# Altium PCB wulpus_pro_shield.PcbDoc (part 3 of 3)
Units mm, origin at the board's own origin, x right, y up, seen from the top; angles counter-clockwise.
Board outline 44.9 x 21 mm, 6 copper layers (Top Layer, Layer 2, Layer 3, Layer 4, Layer 5, Bottom Layer), stack 0.913 mm thick; 186 components, 134 nets, 731 pads, 283 vias.
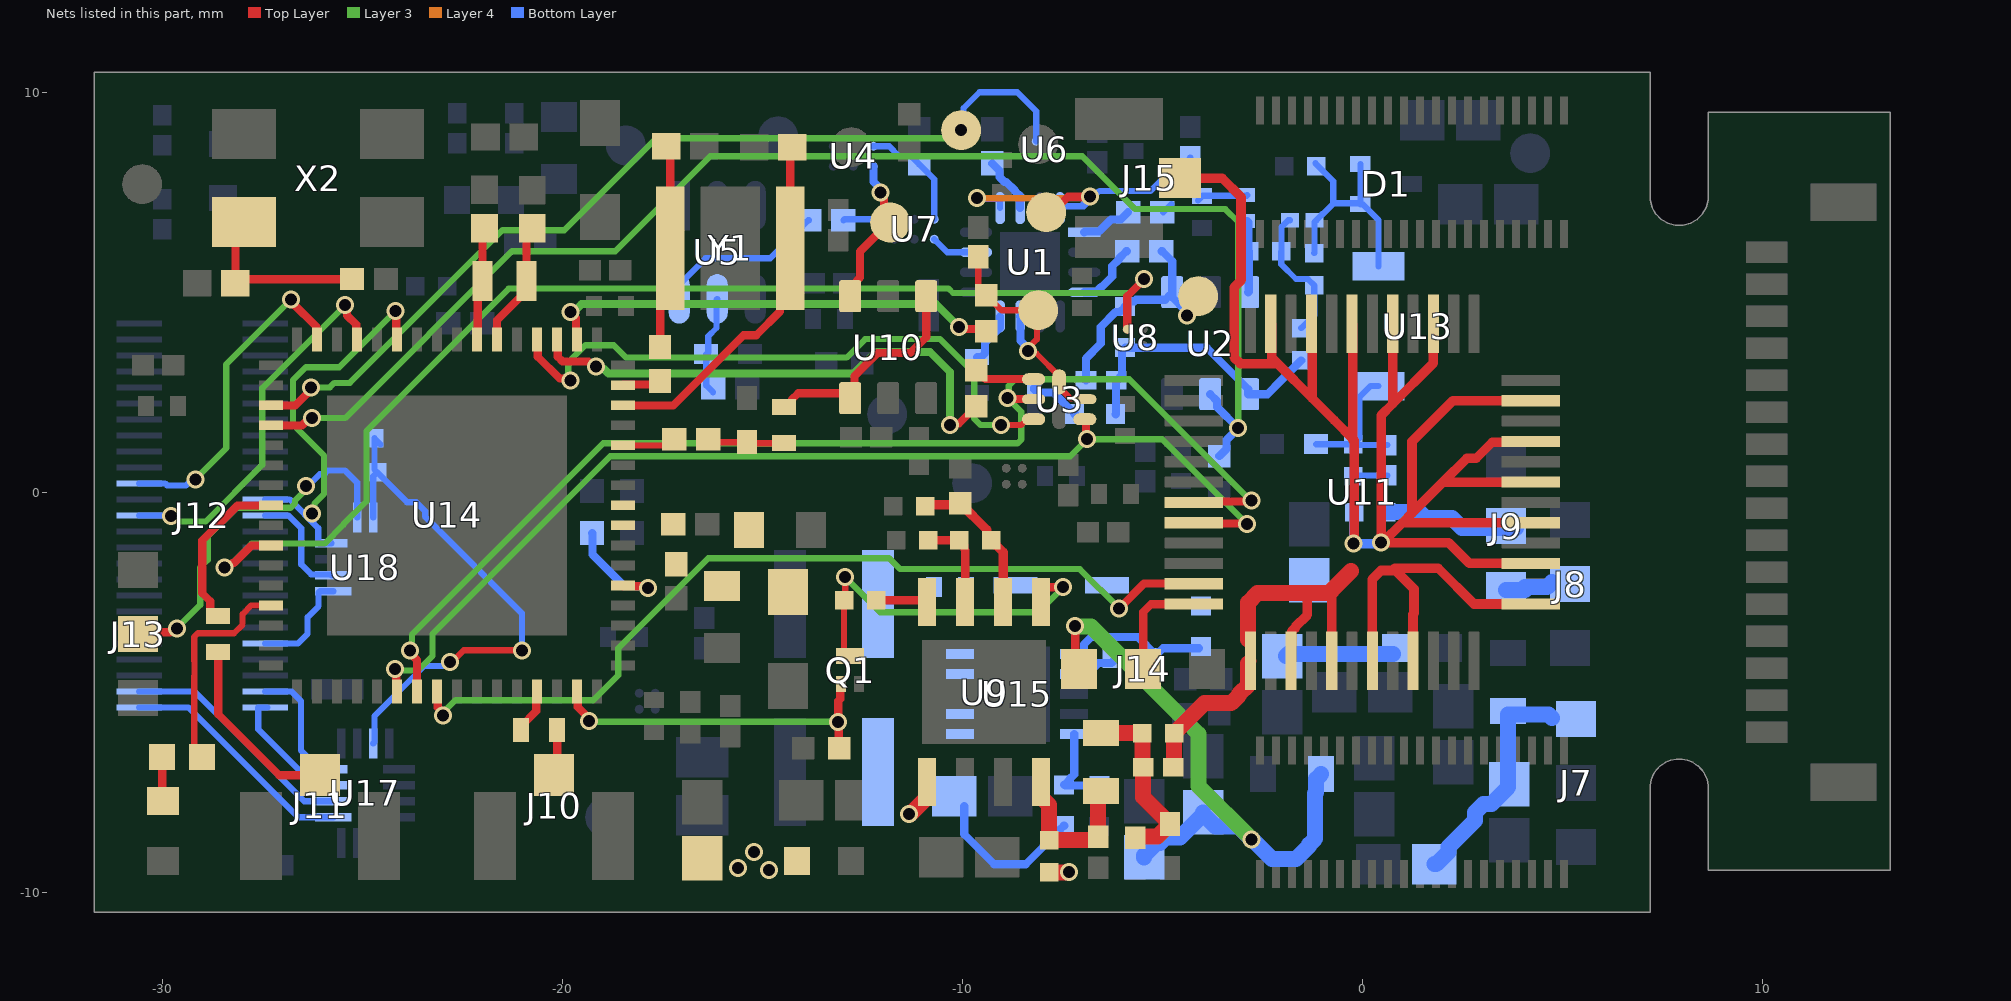
[diagram p7: the nets of this part, all layers, seen from the top]

## Via types
v1: diameter 0.45, hole 0.3, Top Layer to Bottom Layer, tented both sides, 283 vias

## Nets (pads, with @x,y where several pads share a name; then routed paths per layer and width w, separated by ;. In a path a pad name is that pad's centre, name@x,y a point inside that pad or via, vN(x,y) a via of type N, cw(c..) or ccw(c..) an arc to the next point about the centre after c; other vN are vias at no path point) (continued)
JTAG_TDO: J12.38 U14.13 | length 9.6
  Top Layer w0.203: v1@-25.422,4.675 -25.379,4.633 -25.379,4.423 -25.148,4.192 -25.148,3.838 U14.13@-25.13,3.82
  Layer 3 w0.152: v1(-29.781,-0.588) -29.701,-0.588 -29.557,-0.732 -28.914,-0.732 -27.5,0.683 -27.5,2.602 v1(-25.427,4.675)
  Bottom Layer w0.152: J12.38@-30.575,-0.58 -29.789,-0.58 v1(-29.781,-0.588)
JTAG_TEST: J12.12 U14.11 U18.4 | length 10.4
  Top Layer w0.203: v1(-24.167,4.533) -24.192,4.533 -24.2,4.525 -24.2,4.458 -24.148,4.407 -24.148,3.838 U14.11@-24.13,3.82
  Layer 3 w0.152: v1(-26.255,-0.532) -26.198,-0.475 -26.198,-0.283 -25.952,-0.037 -25.952,0.914 -26.726,1.688 -26.726,2.809 -26.41,3.125 -25.575,3.125 v1(-24.167,4.533)
  Bottom Layer w0.152: J12.12@-27.425,-0.18 -26.817,-0.18 -26.1,-0.897 -26.1,-1.152 -26.099,-1.153 -26.099,-1.241 -26.065,-1.275 U18.4@-25.77,-1.275 ; v1(-26.255,-0.532) -26.224,-0.563 -26.224,-0.774
JTAG_TMS: J12.40 U14.15 | length 8.3
  Top Layer w0.203: v1(-26.776,4.821) -26.73,4.776 -26.73,4.721 -26.148,4.139 -26.148,3.838 U14.15@-26.13,3.82
  Layer 3 w0.152: v1(-29.169,0.324) -29.169,0.33 -28.399,1.101 -28.399,3.198 v1(-26.776,4.821)
  Bottom Layer w0.152: J12.40@-30.575,0.22 -29.93,0.22 -29.88,0.171 -29.403,0.171 -29.25,0.324 v1(-29.169,0.324) ; v1@-26.759,4.838 v1(-26.776,4.821) v1@-26.73,4.776
LED_MSP430: R36.1 U14.29 | length 5.5
  Top Layer w0.152: R36.1@-29,-6.625 -29.2,-6.425 -29.2,-4.6 -29.195,-4.595 -29.195,-4.222 -29.2,-4.217 -29.2,-3.615 -29.111,-3.526 -28.206,-3.526 -27.99,-3.31 -27.99,-3.047 -27.774,-2.831 U14.29@-27.28,-2.831
LFXIN: C55.2 U14.6 Y2.1 | length 3.1
  Top Layer w0.203: U14.6@-21.63,3.82 -21.63,4.301 -21.05,4.882 -21.038,4.882 -20.89,5.03 Y2.1@-20.89,5.28 -20.89,6.456 C55.2@-20.75,6.596
LFXOUT: C53.2 U14.7 Y2.2 | length 2.9
  Top Layer w0.203: U14.7@-22.13,3.82 -22.112,3.838 -22.112,5.159 Y2.2@-21.99,5.28 -21.99,6.551 C53.2@-21.94,6.601
LVL_SHIFTER_EN: R45.1 R46.2 U17.7 U18.7 | length 13.4
  Top Layer w0.152: v1@-22.803,-4.245 -22.803,-4.274 -22.786,-4.274 -22.462,-3.95 -21.024,-3.95 -21.024,-3.955 v1(-21.008,-3.955)
  Bottom Layer w0.152: U17.7@-24.725,-6.28 -24.691,-6.246 -24.691,-5.591 -23.443,-4.343 -22.855,-4.343 -22.824,-4.312 -22.824,-4.266 v1@-22.803,-4.245 ; U18.7@-24.725,-0.63 -24.725,0.4 R46.2@-24.627,0.498 ; R46.2@-24.698,0.569 R45.1@-24.698,1.348 ; R45.1@-24.698,1.35 R45.1@-24.698,1.348 ; R46.2@-24.627,0.5 R46.2@-24.627,0.498 ; R45.1@-24.54,1.19 R45.1@-24.698,1.348 ; v1@-21.011,-3.955 v1(-21.008,-3.955) ; v1@-21.008,-3.944 -21.008,-3.024 -23.424,-0.608 -23.424,-0.476 -23.65,-0.25 -23.879,-0.25 R46.2@-24.627,0.498
  other v1: -22.803,-4.245
MSP_DR1: J12.13 U18.2 | length 2.8
  Bottom Layer w0.152: J12.13@-27.425,-0.58 -26.845,-0.58 -26.525,-0.9 -26.525,-1.805 -26.277,-2.052 -25.793,-2.052 U18.2@-25.77,-2.075
MSP_DR2: J12.21 U18.1 | length 2.7
  Bottom Layer w0.152: J12.21@-27.425,-3.78 -26.605,-3.78 -26.365,-3.54 -26.365,-3.12 -26.092,-2.847 -26.092,-2.509 -26.058,-2.475 U18.1@-25.72,-2.475
NetC1_1: C1.1 R2.2 R3.1 R7.2 U2.4 | length 7.1
  Bottom Layer w0.203: R2.2@-6.162,1.95 -6.156,1.956 -6.156,2.794 C1.1@-6.15,2.8 -6.136,2.8 -6.002,2.935 -6.002,3.536 R3.1@-5.925,3.612 -3.887,3.612 -2.85,2.575 U2.4@-2.85,2.45 -2.373,2.45 -2.016,2.807 -2.016,2.809 -1.527,3.298 R7.2@-1.525,3.298
NetC3_2: C3.2 R2.1 | length 1.3
  Bottom Layer w0.203: C3.2@-8.2,2.604 -8.2,2.569 -8.12,2.489 -7.714,2.489 -7.188,1.963 R2.1@-7.188,1.95 R2.1@-7.21,1.973
NetC4_2: C4.2 U1.4 | length 1.7
  Bottom Layer w0.203: U1.4@-6.95,5 -6.658,5 -6.53,5.129 -6.513,5.129 -6.25,5.392 -6.25,5.654 -6.085,5.819 -6.085,5.84 -5.9,6.025 C4.2@-5.879,6.025
NetC6_1: C6.1 D1.1 D1.2 R6.1 R28.2 U13.3 | length 6.1
  Bottom Layer w0.152: R6.1@-1.2,5.977 -1.196,5.981 -1.196,6.75 -1.146,6.8 -1.146,6.804 -1.001,6.949 -0.988,6.949 -0.724,7.213 -0.724,7.774 -1.173,8.223 R28.2@-1.173,8.225 ; -0.724,7.225 -0.07,7.225 D1.1@-0.045,7.2 ; D1.2@-0.045,8.2 D1.1@-0.045,7.2 ; U13.3@0.407,5.649 0.407,6.803 0.01,7.2 D1.1@-0.045,7.2
NetC6_2: C6.2 R6.2 R7.1 R8.1 | length 3.5
  Bottom Layer w0.152: R8.1@-2.023,6.025 -2.025,6.023 -2.025,5.7 -1.656,5.331 -1.358,5.331 R6.2@-1.2,5.173 -1.2,4.425 R7.1@-1.525,4.102 R7.1@-1.525,4.102 ; R8.1@-2.02,6.03 -2.02,6.63 -1.85,6.8 C6.2@-1.804,6.8
NetC7_2: C7.2 U1.1 | length 1.3
  Bottom Layer w0.203: U1.1@-6.95,6.5 -6.932,6.518 -6.582,6.518 -6.285,6.815 -6.038,6.815 C7.2@-5.854,7
NetC9_2: C9.2 U5.6 | length 4.3
  Bottom Layer w0.152: U5.6@-17.075,4.834 -17.075,5.191 -16.416,5.85 -14.8,5.85 -13.85,6.8 C9.2@-13.829,6.8
NetC21_2: C21.2 C36.2 R15.2 R26.1 R30.2 | length 4.7
  Top Layer w0.4: R15.2@-6.525,-6.025 R30.2@-5.502,-6.025 -5.49,-6.037 -5.49,-6.863 C36.2@-5.479,-6.875 -5.479,-7.621 -4.9,-8.2 -4.85,-8.2 -4.8,-8.25 -4.8,-8.35 -4.85,-8.4 -4.91,-8.4 -5.116,-8.605 -5.645,-8.605 C21.2@-5.675,-8.635
NetC23_2: C23.2 C38.1 R21.2 | length 1.9
  Top Layer w0.152: C38.1@-16.346,1.325 -16.271,1.25 C23.2@-15.375,1.25 -15.35,1.225 R21.2@-14.45,1.225
NetC34_1: C34.1 C35.1 J7.1 R24.2 | length 5.8
  Bottom Layer w0.4: C34.1@1.801,-9.3 1.85,-9.3 2.153,-8.997 2.153,-8.871 2.822,-8.202 2.822,-8.003 3.027,-7.798 3.226,-7.798 3.65,-7.374 3.65,-5.562 4.662,-5.562 4.75,-5.65
NetC37_1: C37.1 R25.1 R29.2 U13.1 | length 3.6
  Bottom Layer w0.152: R29.2@-1.15,1.2 R25.1@-0.225,1.2 ; U13.1@0.407,2.651 0.204,2.651 -0.075,2.372 -0.075,1.35 R25.1@-0.225,1.2 ; C37.1@0.625,1.179 -0.204,1.179 R25.1@-0.225,1.2
NetC38_2: C38.2 U14.60 | length 1.3
  Top Layer w0.152: U14.60@-18.48,1.17 -17.358,1.17 C38.2@-17.204,1.325
NetC49_2: C49.2 R35.1 X2.1 | length 4.6
  Top Layer w0.203: X2.1@-27.95,6.75 -28.171,6.529 C49.2@-28.171,5.225 -28.071,5.325 R35.1@-25.25,5.325
NetC52_2: C52.2 R38.1 Y1.1 | length 5.2
  Top Layer w0.203: R38.1@-17.55,3.625 -17.55,5.85 Y1.1@-17.3,6.1 -17.3,8.546 C52.2@-17.404,8.65
NetC62_1: C62.1 D3.1 U15.5
NetC62_2: C62.2 L4.2 U15.4
NetC77_2: C77.2 U1.14 | length 1.4
  Bottom Layer w0.203: C77.2@-9.25,8.221 -9.065,8.037 -9.065,7.876 -8.946,7.758 -8.899,7.758 -8.682,7.54 -8.682,7.523 -8.56,7.402 U1.14@-8.56,7.11
NetC78_1: C78.1 C79.1 J14.1 R23.2 | length 15.7
  Top Layer w0.203: v1(-7.176,-3.349) -7.176,-4.324 J14.1@-7.075,-4.425
  Layer 3 w0.4: v1(-7.176,-3.349) -7.166,-3.359 -6.778,-3.359 -4.093,-6.044 -4.093,-7.347 v1(-2.765,-8.675)
  Bottom Layer w0.4: C78.1@-5.45,-9.126 -5.45,-9.076 -5.147,-8.773 -5.059,-8.773 -4.913,-8.627 -4.552,-8.627 C79.1@-3.975,-8.05 ; C79.1@-3.975,-8.001 C79.1@-3.975,-8.05 ; R23.2@-1.025,-7.05 -1.15,-7.175 -1.15,-7.509 -1.175,-7.534 -1.175,-8.662 -1.325,-8.812 -1.325,-8.838 -1.662,-9.175 -2.251,-9.175 -2.751,-8.675 v1(-2.765,-8.675) -2.778,-8.675 -3.1,-8.353 -3.672,-8.353 C79.1@-3.975,-8.05
NetD2_2: D2.2 R36.2 | length 1.1
  Top Layer w0.203: R36.2@-30,-6.625 -30,-7.7 D2.2@-29.975,-7.725
NetJ8_2: J8.2 J9.3 | length 1.2
  Bottom Layer w0.4: J9.3@3.6,-2.45 J9.3@4.075,-2.45 ; J9.3@4.075,-2.375 4.625,-2.375 J8.2@4.75,-2.25
NetJ9_2: J9.2 R27.2 | length 3.4
  Bottom Layer w0.4: R27.2@0.602,-0.5 1.436,-0.5 1.586,-0.65 2.25,-0.65 2.5,-0.9 J9.2@3.85,-0.9
NetJ10_1: J10.1 R33.1 | length 1.2
  Top Layer w0.203: J10.1@-20.2,-7.075 -20.125,-7 R33.1@-20.125,-5.95
NetJ11_1: J11.1 R34.1 | length 4.7
  Top Layer w0.203: R34.1@-28.6,-4 -28.6,-5.549 -27.074,-7.075 J11.1@-26.05,-7.075
NetJ13_2: J13.2 U18.6 | length 9.1
  Top Layer w0.203: J13.2@-30.6,-3.55 -30.552,-3.502 -29.8,-3.502 -29.701,-3.402 v1(-29.634,-3.402)
  Layer 3 w0.152: v1(-29.634,-3.402) -29.05,-2.818 -29.05,-1.883 -28.856,-1.69 -28.856,-1.101 -28.142,-0.387 -26.792,-0.387 -26.676,-0.271 -26.676,-0.203 -26.404,0.069 v1(-26.404,0.15)
  Bottom Layer w0.152: v1(-26.404,0.15) -26.363,0.15 -26.062,0.45 -25.955,0.45 -25.857,0.548 -25.436,0.548 -25.125,0.237 U18.6@-25.125,-0.63
NetJ14_2: J14.2 U11.24 | length 2.8
  Top Layer w0.203: J14.2@-5.475,-4.425 -5.475,-2.995 -5.28,-2.8 -4.222,-2.8 U11.24@-4.216,-2.794
NetL3_2: L3.2 U15.2
NetR4_2: R4.2 U1.8 | length 1.3
  Bottom Layer w0.203: R4.2@-9.625,3.375 -9.525,3.375 -9.427,3.473 -9.427,3.74 -9.053,4.114 U1.8@-9.053,4.397
NetR5_2: R5.2 U3.1 | length 1.5
  Top Layer w0.2: R5.2@-9.65,3.054 -9.646,3.054 -9.418,2.825 U3.1@-8.215,2.825
NetR8_2: R8.2 R9.2 U2.3 | length 1.8
  Bottom Layer w0.203: R9.2@-2.875,6.775 -2.851,6.751 -2.851,6.049 R8.2@-2.827,6.025 -2.839,6.014 -2.839,5.011 U2.3@-2.85,5
NetR21_1: R21.1 U10.1 U10.4 | length 5.5
  Top Layer w0.203: R21.1@-14.45,2.125 -14.35,2.125 -14.252,2.223 -14.252,2.323 -14.1,2.475 -12.8,2.475 -12.689,2.586 -12.689,2.91 -12.119,3.48 -11.295,3.48 -10.9,3.875 U10.1@-10.9,4.9
NetR31_1: R31.1 U14.53 | length 2.9
  Top Layer w0.203: U14.53@-18.48,-2.33 -18.462,-2.349 -17.968,-2.349 -17.917,-2.4 v1(-17.85,-2.4)
  Bottom Layer w0.203: R31.1@-19.25,-1.025 -19.239,-1.036 -19.239,-1.559 -18.446,-2.353 -17.897,-2.353 v1(-17.85,-2.4)
NetR39_1: R39.1 R40.1 U15.10 | length 2.3
  Bottom Layer w0.203: R39.1@-7.45,-7.313 R39.1@-7.443,-7.313 ; R39.1@-7.447,-7.31 R39.1@-7.443,-7.313 ; U15.10@-7.2,-6.048 -7.2,-7.058 -7.302,-7.16 -7.302,-7.177 -7.438,-7.313 R39.1@-7.443,-7.313 ; R40.1@-6.575,-7.333 -7.423,-7.333 R39.1@-7.443,-7.313
NetR41_1: R41.1 U15.7 | length 1.2
  Bottom Layer w0.203: U15.7@-7.2,-4.548 -7.177,-4.524 -6.951,-4.524 -6.852,-4.424 -6.746,-4.424 -6.595,-4.273 -6.273,-4.273 -6.137,-4.137 R41.1@-6.137,-4.125
NetR41_2: R41.2 R42.2 U15.6 | length 3.8
  Bottom Layer w0.203: U15.6@-7.2,-4.048 -6.975,-4.048 -6.951,-4.024 -6.951,-3.799 -6.776,-3.623 -5.602,-3.623 R41.2@-5.163,-4.062 ; R41.2@-5.238,-4.15 -5.163,-4.075 R41.2@-5.163,-4.062 ; R42.2@-4.077,-3.9 -4.983,-3.9 -5.085,-4.002 -5.102,-4.002 R41.2@-5.163,-4.062
NetTP8_1: TP8.1 U4.C2 U10.3 | length 3.8
  Top Layer w0.203: U10.3@-12.8,4.9 -12.626,5.074 -12.626,5.291 -12.551,5.366 -12.551,6.022 -11.83,6.744 TP8.1@-11.8,6.744 ; v1(-12.049,7.499) -12.049,7.432 -11.952,7.335 -11.952,6.893 TP8.1@-11.9,6.841
  Bottom Layer w0.203: U4.C2@-12.225,8.15 -12.225,8.144 -12.221,8.139 -12.221,7.762 -12.025,7.567 -12.025,7.5 -12.026,7.499 v1(-12.049,7.499)
PCAP: C10.1 C11.2 U5.5 | length 2.5
  Bottom Layer w0.152: C10.1@-16.229,2.5 -16.4,2.671 C11.2@-16.4,3.45 -16.35,3.5 -16.35,3.9 -16.144,4.106 -16.144,4.816 U5.5@-16.125,4.834
PREAMP_EN: R12.1 U2.5 U14.20 | length 34.8
  Top Layer w0.203: U14.20@-27.28,1.671 -26.506,1.671 -26.322,1.855 v1(-26.255,1.855)
  Layer 3 w0.152: v1(-26.255,1.855) -25.428,1.855 -21.258,6.025 -18.675,6.025 -16.3,8.4 -7,8.4 -5.676,7.076 -3.419,7.076 -3.099,6.756 -3.099,4.001 -3.1,4 v1(-3.1,1.6)
  Bottom Layer w0.203: U2.5@-3.8,2.45 -3.626,2.277 -3.626,2.127 v1(-3.1,1.6) -3.39,1.31 -3.39,1.085 -3.573,0.902 R12.1@-3.575,0.902
PREAMP_PWR_EN: U8.B2 U14.26 | length 30
  Top Layer w0.203: v1(-28.439,-1.887) -28.372,-1.887 -28.249,-1.765 -28.208,-1.765 -27.773,-1.33 U14.26@-27.28,-1.33 ; U8.B2@-5.875,4.075 -5.875,4.9 v1(-5.45,5.325) v1@-5.497,5.372
  Layer 3 w0.152: v1(-28.439,-1.887) -28.366,-1.887 -27.764,-1.286 -25.943,-1.286 -25.472,-0.815 -25.472,-0.806 -24.898,-0.231 -24.898,1.53 -21.338,5.089 -10.339,5.089 -10.231,4.981 -5.794,4.981 v1(-5.45,5.325)
PULS_HIZ_EN: Q1.1 R16.2 U14.47 | length 8.7
  Top Layer w0.203: U14.47@-19.63,-4.98 -19.612,-4.998 -19.612,-5.372 -19.325,-5.658 v1(-19.325,-5.725) ; R16.2@-13.073,-6.4 -13.086,-6.386 -13.086,-5.764 v1(-13.1,-5.75) -13.1,-5.221 -13.049,-5.169 -13.049,-4.823 Q1.1@-13.025,-4.8
  Layer 3 w0.152: v1(-19.325,-5.725) -19.312,-5.737 -13.112,-5.737 v1(-13.1,-5.75)
PULSER_EN_A: Q1.3 R19.1 U9.1 | length 9.2
  Top Layer w0.152: v1(-12.925,-2.125) -12.925,-2.673 R19.1@-12.952,-2.7 -12.952,-3.976 -12.828,-4.1 Q1.3@-12.8,-4.1
  Top Layer w0.203: U9.1@-8.025,-3.002 -8.025,-2.499 -7.901,-2.375 v1(-7.475,-2.375)
  Layer 3 w0.152: v1(-12.925,-2.125) -12.05,-3 -8.1,-3 v1(-7.475,-2.375)
PULSER_EN_B: R19.2 U9.4 | length 1.3
  Top Layer w0.203: R19.2@-12.148,-2.7 -10.925,-2.7 U9.4@-10.875,-2.75
PULSER_IN_A: R13.2 R14.2 R17.1 U9.2 | length 3.8
  Top Layer w0.24: R13.2@-10.923,-0.35 -10.886,-0.314 -10.086,-0.314 R14.2@-10.05,-0.277 -10.048,-0.277 -9.387,-0.938 -9.387,-1.086 R17.1@-9.273,-1.2 R17.1@-9.273,-1.2 -8.975,-1.5 U9.2@-8.975,-2.75
PULSER_IN_B: R17.2 R18.2 U9.3 | length 2.4
  Top Layer w0.203: R18.2@-10.848,-1.2 R17.2@-10.077,-1.2 -9.945,-1.332 -9.945,-1.434 -9.925,-1.454 U9.3@-9.925,-2.75
PULSER_OUT_A: C20.2 R15.1 R20.1 U9.8 | length 3.9
  Top Layer w0.4: U9.8@-8.025,-7.25 -8,-7.275 -8,-7.65 -7.825,-7.825 R20.1@-7.825,-8.698 -6.668,-8.698 -6.66,-8.69 C20.2@-6.6,-8.69 ; C20.2@-6.6,-8.61 -6.6,-7.55 R15.1@-6.525,-7.475
PULSER_OUT_B: R20.2 U9.5 | length 1.5
  Top Layer w0.3: v1(-11.325,-8.05) v1@-11.3,-8.05
  Top Layer w0.4: v1(-11.325,-8.05) -11.315,-8.04 -11.29,-8.04 -10.875,-7.625 U9.5@-10.875,-7.25 ; v1(-7.325,-9.5) -7.326,-9.501 R20.2@-7.824,-9.501 ; R20.2@-7.825,-9.502 R20.2@-7.824,-9.501
PVCC: C39.2 C40.2 C41.1 C42.1 L1.2 U14.56 U14.57
RF_BYPASS: R11.1 U4.C1 U7.C1 | length 2.9
  Bottom Layer w0.152: U4.C1@-12.225,8.65 -11.825,8.65 -11.581,8.406 -11.283,8.406 R11.1@-11.075,8.198 -11.073,8.198 -10.7,7.825 U7.C1@-10.7,6.825
RF_IN_ENV: C9.1 U7.A1 | length 1.4
  Bottom Layer w0.152: C9.1@-12.971,6.8 -12.946,6.825 -11.95,6.825 ; -11.825,6.825 -11.95,6.825 ; U7.A1@-11.7,6.825 -11.95,6.825
RX_SPI_CLK: U3.5 U11.20 U14.38 | length 27.4
  Top Layer w0.203: v1(-24.18,-4.42) -24.148,-4.452 -24.148,-4.961 U14.38@-24.13,-4.98 ; U3.5@-6.935,1.825 -6.905,1.795 -6.905,1.355 v1(-6.875,1.325) ; U11.20@-4.216,-0.762 -4.197,-0.781 -2.894,-0.781 v1(-2.875,-0.8)
  Layer 3 w0.152: v1(-24.18,-4.42) -24.143,-4.457 -23.607,-4.457 -23.242,-4.092 -23.242,-3.542 -18.8,0.9 -7.3,0.9 v1(-6.875,1.325) ; v1@-6.85,1.325 -5,1.325 v1(-2.875,-0.8)
RX_SPI_MISO: U11.23 U14.40 | length 22.3
  Top Layer w0.203: U14.40@-23.13,-4.98 -23.112,-4.998 -23.112,-5.38 -22.975,-5.516 v1(-22.975,-5.583) ; v1(-6.075,-2.906) -5.455,-2.286 U11.23@-4.216,-2.286
  Layer 3 w0.152: v1(-22.975,-5.583) -22.975,-5.503 -22.672,-5.2 -19.225,-5.2 -18.6,-4.575 -18.6,-3.9 -16.35,-1.65 -11.829,-1.65 -11.555,-1.924 -7.057,-1.924 v1(-6.075,-2.906)
RX_SPI_MOSI: U3.2 U11.19 U14.39 | length 29.8
  Top Layer w0.203: v1(-23.8,-3.955) -23.8,-4.022 -23.63,-4.192 U14.39@-23.63,-4.98 ; v1(-8.863,2.35) -8.847,2.334 -8.224,2.334 U3.2@-8.215,2.325 ; U11.19@-4.216,-0.254 -4.194,-0.231 -2.795,-0.231 v1(-2.772,-0.209)
  Layer 3 w0.152: v1(-23.8,-3.955) -23.759,-3.914 -23.759,-3.559 -18.975,1.225 -8.614,1.225 -8.525,1.314 -8.525,2.012 v1(-8.863,2.35) -8.838,2.375 -8.838,2.662 -8.675,2.825 -5.825,2.825 -2.782,-0.218 v1(-2.772,-0.209)
SPI_B_CLK: J12.27 U17.2 | length 5.9
  Bottom Layer w0.152: J12.27@-30.575,-4.98 -29.195,-4.98 -26.45,-7.725 U17.2@-25.77,-7.725
SPI_B_CS: J12.24 U17.4 | length 3.2
  Bottom Layer w0.152: J12.24@-27.425,-4.98 -26.77,-4.98 -26.535,-5.215 ; -26.535,-6.455 -26.099,-6.891 -25.804,-6.891 U17.4@-25.77,-6.925 ; -26.532,-6.452 -26.532,-5.218
SPI_B_MISO: J12.26 U17.1 | length 6
  Bottom Layer w0.152: J12.26@-30.575,-5.38 -29.345,-5.38 -26.6,-8.125 U17.1@-25.72,-8.125
SPI_B_MOSI: J12.25 U17.3 | length 3.2
  Bottom Layer w0.152: J12.25@-27.375,-5.38 J12.25@-27.425,-5.38 -27.6,-5.38 -27.6,-5.926 -27.375,-6.151 -26.235,-7.291 -25.804,-7.291 U17.3@-25.77,-7.325
TRIG_OUT: R33.2 U14.45 | length 1.1
  Top Layer w0.203: R33.2@-21.025,-5.95 -21.025,-5.85 -20.648,-5.473 -20.648,-4.998 U14.45@-20.63,-4.98
TX_RX: C36.1 C37.2 J15.1 R25.2 R27.1 R30.1 U11.3 U11.5 U11.7 U11.9 U11.11 U11.25 U11.27 U11.29 U11.31 U11.33 U11.37 U11.39 U11.41 U11.43 U11.45 U11.47 | length 69
  Top Layer w0.24: J15.1@-4.225,7.85 -3.5,7.85 -3.03,7.38 -3.03,5.297 -3.204,5.124 -3.204,3.374 -3.046,3.215 -2.115,3.215 ; U11.11@-2.286,4.216 -2.266,4.197 -2.266,3.366 -2.115,3.215 ; -1.85,2.95 -2.115,3.215 ; U11.27@-1.778,-4.216 -1.758,-4.197 -1.758,-3.473 -1.68,-3.395 -1.68,-3.374 -1.37,-3.064 -1.37,-2.525 ; U11.9@-1.27,4.216 -1.25,4.197 -1.25,2.35 ; U11.29@-0.762,-4.216 -0.762,-2.462 ; U11.7@-0.254,4.216 -0.234,4.197 -0.234,1.334 ; -0.234,1.3 -0.234,1.334 ; v1(-0.221,-1.286) -0.2,-1.264 -0.2,1.3 -0.234,1.334 ; U11.31@0.254,-4.216 0.254,-2.172 0.469,-1.957 0.832,-1.957 1.295,-2.42 1.295,-3.028 1.27,-3.053 U11.33@1.27,-4.216 ; U11.5@0.762,4.216 0.762,2.212 ; 0.814,-1.9 1.9,-1.9 2.794,-2.794 U11.37@4.216,-2.794 ; U11.3@1.778,4.216 1.778,3.228 0.762,2.212 ; U11.39@4.216,-1.778 2.678,-1.778 2.159,-1.259 v1@0.509,-1.259 ; U11.41@4.216,-0.762 1.005,-0.762 ; U11.43@4.216,0.254 2.021,0.254 ; U11.45@4.216,1.27 4.197,1.25 3.25,1.25 2.85,0.85 2.617,0.85 2.021,0.254 ; U11.47@4.216,2.286 2.261,2.286 1.243,1.268 1.243,-0.524 ; -2.115,3.215 -1.25,2.35 ; -1.25,2.35 -0.7,1.8 -0.234,1.334 ; v1@0.509,-1.259 1.005,-0.762 ; v1@0.509,-1.259 v1(0.473,-1.259) 0.473,1.923 0.762,2.212 ; 1.005,-0.762 1.243,-0.524 ; 1.243,-0.524 2.021,0.254
  Top Layer w0.3: U11.25@-2.854,-4.277 U11.25@-2.794,-4.216
  Top Layer w0.4: C36.1@-4.721,-6.875 -4.71,-6.863 -4.71,-6.037 R30.1@-4.698,-6.025 -3.948,-5.275 -3.28,-5.275 -3.075,-5.07 -3.075,-5.042 -2.854,-4.821 U11.25@-2.854,-4.277 ; U11.25@-2.854,-3.685 -2.854,-2.759 -2.619,-2.525 -1.37,-2.525 -0.825,-2.525 -0.762,-2.462 -0.762,-2.447 -0.278,-1.963
  Bottom Layer w0.152: R27.1@-0.202,-0.5 -0.202,0.421 C37.2@0.625,0.421
  Bottom Layer w0.24: v1@-0.25,-1.314 v1(-0.221,-1.286) 0.448,-1.284 v1(0.473,-1.259) ; v1@-0.212,-1.276 -0.212,-0.51 R27.1@-0.202,-0.5
USSXTIN: C54.2 U14.62 Y1.3 | length 9.1
  Top Layer w0.203: U14.62@-18.48,2.171 -17.224,2.171 -15.469,3.925 -15.15,3.925 -14.554,4.521 -14.554,5.846 Y1.3@-14.3,6.1 -14.3,8.571 C54.2@-14.246,8.625
USSXTOUT: R38.2 U14.63 | length 1
  Top Layer w0.203: U14.63@-18.48,2.671 -18.462,2.689 -17.636,2.689 R38.2@-17.55,2.775
UUPS_TRIG_IN: R34.2 U14.24 | length 4.2
  Top Layer w0.203: R34.2@-28.6,-3.1 -28.7,-3.1 -28.798,-3.002 -28.798,-2.725 -29,-2.524 -29,-1.209 -28.121,-0.33 U14.24@-27.28,-0.33
VGA_GAIN: C5.1 R1.2 TP1.1 U1.7 U3.6 U3.8 | length 6.5
  Top Layer w0.152: C5.1@-9.6,5.884 -9.6,5.127 R1.2@-9.4,4.927 -9.398,4.927 -9.021,4.55 TP1.1@-8.1,4.55 -8.134,4.516 -8.134,3.821 -8.35,3.606 v1(-8.35,3.525) v1@-8.325,3.55 ; v1@-8.143,3.468 -7.575,2.9 U3.8@-7.575,2.76 -7.575,2.625 -7.375,2.425 -7.294,2.344 -6.954,2.344 U3.6@-6.935,2.325
  Bottom Layer w0.203: U1.7@-8.553,4.397 -8.546,4.39 -8.546,3.788 -8.35,3.592 v1(-8.35,3.525)
VGA_GAIN_CS: U3.3 U14.4 | length 15.7
  Top Layer w0.152: v1(-9.034,1.684) -8.518,1.684 -8.377,1.825 U3.3@-8.215,1.825
  Top Layer w0.203: U14.4@-20.63,3.82 -20.612,3.802 -20.612,3.388 -20.063,2.839 -19.84,2.839 v1(-19.793,2.792)
  Layer 3 w0.152: -19.85,3.244 -19.85,2.849 v1(-19.793,2.792) ; -19.851,3.245 -19.42,3.675 -18.713,3.675 -18.403,3.365 -12.889,3.365 -12.425,3.829 -10.554,3.829 -9.7,2.975 -9.7,1.839 -9.545,1.684 v1(-9.034,1.684)
VGA_GAIN_RC_EN: R5.1 U14.3 | length 13
  Top Layer w0.2: v1(-10.3,1.676) -10.252,1.724 -10.076,1.724 -9.654,2.146 R5.1@-9.65,2.146
  Top Layer w0.203: U14.3@-20.13,3.82 -20.112,3.802 -20.112,3.387 -19.993,3.268 -19.345,3.268 -19.222,3.145 v1(-19.155,3.145)
  Layer 3 w0.2: v1(-19.155,3.145) -19.107,3.097 -18.972,3.097 -18.846,2.971 -12.704,2.971 -12.175,3.5 -10.8,3.5 -10.3,3 v1(-10.3,1.676)
VGA_GAIN_RC_SINK: R1.1 U14.2 | length 11.5
  Top Layer w0.2: v1(-19.788,4.5) -19.775,4.487 -19.777,4.485 -19.65,4.357 -19.65,3.84 U14.2@-19.63,3.82 ; v1(-10.075,4.125) -10.027,4.077 -9.454,4.077 R1.1@-9.4,4.023
  Layer 3 w0.2: v1(-19.788,4.5) -19.72,4.5 -19.52,4.7 -10.65,4.7 v1(-10.075,4.125)
VGA_IN: C1.2 C4.1 R3.2 TP2.1 U2.1 | length 6
  Top Layer w0.203: v1(-4.383,4.421) -4.383,4.431 -4.05,4.765 TP2.1@-4.05,4.8
  Bottom Layer w0.203: C1.2@-6.907,2.8 -6.907,3.343 -6.536,3.714 -6.536,4.131 -6.165,4.502 -6.061,4.502 R3.2@-5.925,4.638 ; R3.2@-5.937,4.638 R3.2@-5.925,4.638 ; C4.1@-5.021,6.025 -5,6.025 -4.75,5.775 -4.75,4.985 -4.75,4.875 -4.431,4.556 -4.431,4.468 v1(-4.383,4.421) ; U2.1@-4.805,4.93 -4.923,4.811 -5.658,4.811 -5.695,4.774 -5.789,4.774 R3.2@-5.925,4.638
VGA_OUT: U1.11 U7.C2 | length 1.2
  Bottom Layer w0.152: U7.C2@-10.7,6.325 -10.375,6 U1.11@-9.656,6
VGA_PWR_EN: TP4.1 U6.B2 U14.19 | length 23.6
  Top Layer w0.203: U14.19@-27.28,2.171 -26.676,2.171 -26.275,2.571 v1(-26.275,2.622)
  Layer 3 w0.152: v1(-26.275,2.622) -25.81,2.622 -25.698,2.734 -25.313,2.734 -21.497,6.55 -19.95,6.55 -17.65,8.85 -10.263,8.85 -10.063,9.05 v1(-10.025,9.05)
  Bottom Layer w0.152: v1(-10.025,9.05) -9.968,9.107 -9.968,9.6 -9.569,10 -8.625,10 -8.15,9.525 U6.B2@-8.15,8.775
VGA_VREF: C2.2 C7.1 C8.1 R9.1 TP7.1 U1.13 U1.16 | length 10.6
  Top Layer w0.203: TP7.1@-7.875,6.975 -7.771,6.975 -7.358,7.388 v1(-6.806,7.388)
  Layer 4 w0.152: v1(-9.625,7.35) -6.844,7.35 v1(-6.806,7.388)
  Bottom Layer w0.152: v1(-9.625,7.35) -9.605,7.33 -9.093,7.33 -9.053,7.29 U1.13@-9.053,7.103 ; U1.16@-7.553,7.103 -7.553,7.11 -7.513,7.15 -6.963,7.15 ; v1@-6.94,7.222 -6.963,7.2 -6.963,7.15 ; v1(-6.806,7.388) -6.963,7.232 -6.963,7.15 ; C7.1@-4.975,7 C7.1@-4.765,7.21 ; C2.2@-4.3,8.37 -4.3,8.352 -4.484,8.168 -4.656,8.168 -5.289,7.535 -6.568,7.535 -6.587,7.515 -6.598,7.515 -6.765,7.348 -6.765,7.347 -6.922,7.191 -6.963,7.15 ; C8.1@-4.104,7.296 -3.987,7.412 -2.887,7.412 R9.1@-2.875,7.425
VOUT_NEG: C56.1 C63.1 D3.2 FB1.1 R42.1 | length 2.7
  Bottom Layer w0.4: C56.1@-1.9,-4.099 -1.85,-4.05 FB1.1@0.775,-4.05
VOUT_POS: C58.1 C60.1 FB2.1 R39.2 U15.1 | length 3.9
  Bottom Layer w0.203: C58.1@-9.951,-7.85 -9.951,-8.549 -9.2,-9.3 -8.413,-9.3 -7.598,-8.485 -7.598,-8.473 -7.55,-8.425 -7.462,-8.337 R39.2@-7.45,-8.337
  other v1: -14.825,-9.45 -15.6,-9.4 -15.2,-9
pads on no net: J1.3 J1.4 J1.37 J1.38 J2.3 J2.4 J2.37 J2.38 J4.17 J4.18 J6.17 J6.18 J12.3 J12.4 J12.5 J12.8 J12.9 J12.11 J12.14 J12.15 J12.16 J12.17 J12.19 J12.20 J12.22 J12.23 J12.28 J12.29 J12.30 J12.31 J12.32 J12.34 J12.35 J12.36 J12.44 J12.45 J12.46 J12.47 J12.48 U1.2 U1.3 U1.9 U1.10 U1.12 U11.1 U11.2 U11.14 U11.16 U11.35 U11.36 U13.2 U13.2_4 U14.21 U14.22 U14.23 U14.28 U14.30 U14.32 U18.3 U18.10

## Polygon pours and split planes (outlines as drawn)
GND on Bottom Layer "GND_L06_P071" (solid, remove dead copper, pour order 71): -47.5,-10.5 14.95,-10.5 14.969,27.5 -47.5,27.5
+VBAT on Bottom Layer "+VBAT_L06_P067" (solid, pour order 67): -27.995,4.5 -27.995,4.322 -27.995,3.75 -26.868,3.75 -26.866,3.753 -26.011,3.075 -24.8,2.2 -22.563,0.516 -21.806,-0.881 -21.125,-1.811 -19.475,-3.35 -19.413,-3.413 -19.179,-3.821 -19.055,-3.88 -18.65,-3.88 -18.7,-2.925 -20.05,-1.38 -20.625,-0.2 -21.125,0.67 -22.206,1.627 -24.1,3.075 -25.625,3.875 -26.011,4.164 -26.759,4.474
+5V on Bottom Layer "NONET_L-01_P-001" (solid, pour order 68): -7.775,0.2 -8.675,0.2 -8.7,0.225 -8.95,0.225 -8.95,0.25 -9.425,0.725 -10.2,0.725 -10.2,0.625 -11.425,-0.6 -11.475,-0.55 -13.3,-0.55 -14.375,0.525 -19.2,0.525 -21.5,2.825 -22.325,2.825 -22.325,3.25 -22.125,3.45 -20.175,3.45 -19.15,2.425 -17.15,2.425 -16.25,1.525 -8.65,1.525 -7.775,0.65 -7.75,0.65
+V_RX_CONN on Bottom Layer "+V_RX_CONN_L06_P057" (solid, pour order 57): -22.847,8.979 -22.95,7.642 -22.952,7.64 -22.95,7.638 -22.95,6.35 -22.85,6.25 -22.375,6.25 -22.3,6.35 -22.3,7.638 -22.379,8.979
BOT_EL on Bottom Layer "NONET_L-01_P-001" (solid, pour order 70): 3.725,7.525 5.275,5.975 5.275,-8.775 7.2,-8.775 7.25,-8.725 7.15,-8.625 7.15,10.3 7.075,10.375 7.05,10.35 3.7,10.35
VOUT_NEG on Bottom Layer "VOUT_NEG_L06_P065" (solid, pour order 65): -6.936,-2.114 -6.936,-2.528 -6.933,-2.532 -5.831,-2.532 -4.277,-3.351 -4.276,-3.35 -3.776,-3.351 -2.397,-4.654 -2.391,-4.647 -1.405,-4.647 -1.405,-3.541 -1.298,-2.851 -1.298,-1.734 -2.294,-1.734 -3.776,-2.877 -4.277,-2.877 -5.831,-2.115
+V_IO_IN on Bottom Layer "+V_IO_IN_L06_P047" (solid, pour order 47): -28.15,0.729 -28.15,-2.255 -28.15,-4.85 -29.572,-4.85 -29.775,-4.651 -29.775,1.55 -28.825,2.5 -28.15,2.525
VGA_VREF on Bottom Layer "VGA_VREF_L06_P060" (solid, pour order 60): -7.555,7.502 -7.098,7.502 -6.513,8.087 -6.513,8.42 -5.965,8.42 -3.75,7.594 -3.746,7.598 -2.679,7.598 -2.679,7.258 -2.671,7.249 -2.72,7.2 -4.244,7.2 -4.688,6.714 -5.295,6.714 -5.295,7.273 -5.451,7.535 -6.281,7.535 -6.964,6.852 -7.252,6.77 -7.555,6.777
VOUT_POS on Bottom Layer "VOUT_POS_L06_P080" (solid, pour order 80): -9.7,-5.938 -9.7,-6.163 -9.65,-6.323 -9.398,-7.073 -9.391,-8.691 -10.775,-10.075 -15.425,-10.075 -15.9,-9.6 -15.9,-8.825 -15.775,-8.7 -12.462,-8.7 -11.3,-8.45 -10.5,-8.038 -10.501,-7.074 -10.407,-5.922 -9.716,-5.922
VOUT_POS on Bottom Layer "VOUT_POS_L06_P074" (solid, pour order 74): -9.7,-5.938 -9.7,-6.163 -9.65,-6.323 -9.398,-7.073 -9.391,-8.691 -10.775,-10.075 -15.425,-10.075 -15.9,-9.6 -15.9,-8.825 -15.775,-8.7 -12.462,-8.7 -11.3,-8.45 -10.5,-8.038 -10.501,-7.074 -10.407,-5.922 -9.716,-5.922
VOUT_POS on Bottom Layer "VOUT_POS_L06_P066" (solid, pour order 66): -9.7,-5.938 -9.7,-6.163 -9.65,-6.323 -9.398,-7.073 -9.391,-8.691 -10.775,-10.075 -15.425,-10.075 -15.9,-9.6 -15.9,-8.825 -15.775,-8.7 -12.462,-8.7 -11.3,-8.45 -10.5,-8.038 -10.501,-7.074 -10.407,-5.922 -9.716,-5.922
+V_RX on Bottom Layer "+V_RX_L06_P062" (solid, pour order 62): -21.429,8.966 -21.596,7.651 -21.596,6.943 -21.185,6.943 -20.688,6.445 -20.698,6.434 -20.698,5.942 -20.12,5.942 -19.617,6.445 -19.617,8.207 -20.508,8.207 -20.958,8.457 -20.958,8.971
+VCC_MSP430_CONN on Bottom Layer "+VCC_MSP430_CONN_L06_P056" (solid, pour order 56): -30.231,7.594 -30.233,7.592 -30.233,7.075 -29.788,7.075 -29.502,6.788 -29.087,6.788 -28.826,7.026 -28.127,7.026 -28.127,7.688 -28.935,7.688 -29.11,7.863 -29.515,7.863 -29.784,7.594
DVCC1 on Bottom Layer "DVCC1_L06_P055" (solid, pour order 55): -30.23,8.931 -30.232,8.929 -30.232,8.417 -29.792,8.417 -29.5,8.125 -29.085,8.125 -28.8,8.375 -28.812,8.375 -28.125,8.375 -28.125,9.025 -28.933,9.025 -29.108,9.2 -29.513,9.2 -29.782,8.931
+V_IN_HV on Bottom Layer "+V_IN_HV_L06_P069" (solid, pour order 69): -17.781,-5.487 -17.154,-6.067 -17.154,-7.075 -15.853,-7.075 -14.7,-8.228 -14.7,-8.352 -13.902,-8.352 -13.9,-8.35 -13.904,-8.346 -13.898,-5.457 -11.655,-5.307 -10.378,-5.176 -9.701,-5.174 -9.701,-4.921 -9.702,-4.923 -10.4,-4.923 -11.875,-4.5 -13.902,-4.146 -13.898,-4.143 -13.898,-1.45 -14.697,-1.45 -14.7,-1.453 -14.7,-3.85 -16.157,-5.307 -17.729,-5.307 -17.792,-5.37
+V_RX on Bottom Layer "+V_RX_L06_P061" (solid, pour order 61): -15.436,4.881 -15.43,4.875 -15.43,3.864 -15.601,3.693 -15.599,3.691 -15.599,3.204 -15.003,3.204 -15.002,3.203 -13.526,4.074 -13.526,4.581 -13.423,4.969 -13.423,5.103 -13.423,5.484 -14.941,5.484 -15.174,5.452 -15.21,4.881
NetC62_1 on Bottom Layer "NETC62_1_L06_P058" (solid, pour order 58): -9.221,-2.531 -9.701,-2.718 -9.7,-2.718 -9.7,-4.173 -10.396,-4.174 -10.396,-3.926 -10.101,-2.615 -10.101,-2.123 -9.701,-2.123 -9.219,-2.117 -8.119,-2.117 -8.119,-2.531
NetC62_2 on Bottom Layer "NETC62_2_L06_P063" (solid, pour order 63): -11.703,-1.453 -10.493,-2.132 -10.493,-2.608 -10.533,-2.608 -11.09,-3.165 -11.09,-3.235 -11,-4.028 -10.396,-4.422 -9.7,-4.422 -9.703,-4.671 -9.705,-4.672 -10.396,-4.672 -11.701,-4.145 -11.703,-4.147 -12.498,-4.147 -12.498,-1.451 -12.496,-1.45 -12.493,-1.453
NetL3_2 on Bottom Layer "NETL3_2_L06_P059" (solid, pour order 59): -12.485,-5.648 -12.484,-5.647 -10.397,-5.419 -9.701,-5.419 -9.701,-5.657 -9.701,-5.673 -9.701,-5.677 -10.373,-5.677 -10.4,-5.677 -11.691,-6.53 -11.691,-8.348 -12.484,-8.348
+V_RX on Layer 4 "+V_RX_L04_P052" (solid, pour order 52): -6.798,3.802 -7.345,3.802 -7.475,3.842 -9.783,3.842 -11.05,2.575 -13.725,2.575 -17.85,6.7 -19.975,6.7 -20.3,7.025 -20.3,8.05 -20.225,8.125 -19.125,8.125 -18.775,7.775 -13.9,7.775 -12.15,9.525 -7.2,9.3 -7.2,8.625 -8.3,8.525 -8.3,7.212 -6.3,5.212 -6.3,4.3
DVCC1 on Layer 4 "DVCC1_L04_P076" (solid, pour order 76): -24.8,9.1 -24.45,8.75 -24.425,8.75 -24.425,5.4 -24.075,5.05 -23.575,5.05 -23.2,5.425 -23.2,8.4 -23.175,8.4 -22.475,9.1 -17.275,9.1 -17.05,9.325 -17.05,10.025 -17.5,10.475 -31.625,10.475 -31.625,10.45 -31.625,10.175 -31.625,-5.4 -31.65,-5.425 -31.65,-9.45 -19.375,-9.45 -15.875,-5.95 -13.025,-3.1 -11.475,-1.55 -5.875,-1.55 -5.075,-0.75 -5.075,-0.434 -5.206,-0.302 -5.618,-0.28 -6.269,-0.28 -7.225,-0.75 -14.4,-0.75 -16.775,-2.475 -23.562,-2.475 -24.05,-2.475 -24.911,-3.336 -24.911,-4.094 -24.556,-4.449 -24.567,-5.129 -25.475,-5.745 -28.275,-5.675 -30.063,-4.15 -30.037,-2.903 -29.332,-2.304 -29.345,-0.28 -29.875,0.075 -29.85,1.65 -28.675,2.854 -28.675,3.673 -30.238,5.078 -30.209,7.796 -29.718,8.277 -28.897,8.275 -25.243,9.1
BOT_EL on Layer 4 "BOT_EL_L04_P053" (solid, pour order 53): 5.275,5.975 3.725,7.525 -3.257,7.525 -3.9,8.125 -3.9,9.7 -3.55,10.05 5.45,10.05 7.15,8.35 7.15,5.975
+VCC_MSP430_CONN on Layer 4 "NONET_L-01_P-001" (solid, pour order 78): -29.387,7.863 -30,7.25 -30,5.202 -27.141,2.343 -27.141,1.366 -26.68,0.905 -26.741,0.845 -26.741,0.683 -26.527,0.47 -25.841,0.47 -25.216,1.095 -25.216,3.52 -26.237,4.542 -27.452,4.542 -28.125,5.215 -28.125,7.175
+V_RX_CONN on Layer 4 "NONET_L-01_P-001" (solid, pour order 77): -22.725,8.375 -23,8.1 -23,6.3 -22.2,5.5 -22.2,1.049 -24.524,-1.275 -26.525,-1.275 -27.55,-0.25 -27.55,0.375 -28.15,0.975 -29.75,0.975 -29.936,0.789 -29.936,0.537 -29.728,0.329 -29.444,0.329 -29.444,0.333 -29.224,0.553 -28.954,0.553 -28.954,0.551 -28.842,0.44 -28.842,-0.54 -28.02,-1.363 -28.02,-2.005 -27.921,-2.005 -27.256,-2.669 -27.238,-2.651 -22.551,-2.651 -19.874,0.025 -19.874,5.925 -22.33,8.381 -22.591,8.381
+5V on Layer 4 "NONET_L-01_P-001" (solid, pour order 72): -28.925,1.65 -29.075,1.5 -29.075,1.35 -28.82,1.095 -28.27,1.095 -27.55,0.375 -27.55,-0.15 -26.475,-1.225 -24.8,-1.225 -22.25,1.325 -22.25,2.525 -21.85,2.925 -21.85,3.175 -21.95,3.275 -21.951,3.274 -23.143,3.274 -25.216,1.202 -25.216,1.095 -26.415,-0.104 -26.445,-0.104 -26.82,0.27 -26.82,0.72 -27.8,1.7 -28.68,1.7
BOT_EL on Layer 4 "NONET_L-01_P-001" (solid, pour order 79): -2.25,-6.475 -2.25,-9.525 5.825,-9.525 7.15,-8.2 7.15,-6.475
+HV on Layer 4 "+HV_L04_P050" (solid, pour order 50): -11.25,-9.825 -11.25,-9.8 -10.975,-9.525 -10.975,-9.125 -11.25,-8.85 -11.6,-8.85 -11.8,-8.65 -11.8,-7.775 -11.175,-7.15 -5.337,-7.058 -2.55,-7.925 -2.413,-7.232 -3.85,-6.075 -1.7,-3.61 -1.7,-1.6 -2.413,-1.6 -2.413,-2.638 -5.525,-5.75 -11.15,-5.75 -12.55,-7.15 -12.55,-9.35 -12.075,-9.825
+V_IO_IN on Layer 4 "NONET_L-01_P-001" (solid, pour order 44): -29.946,-4.468 -29.85,-4.372 -29.85,-3.775 -25.275,-3.775 -25.15,-3.9 -25.15,-5.25 -29.075,-5.25 -29.2,-5.125
+V_VGA on Layer 4 "+V_VGA_L04_P048" (solid, pour order 48): -7.9,3.717 -7.9,3.05 -7.6,2.75 -6.25,2.75 -5.7,3.3 -5.7,8.1 -6.1,8.5 -7.7,8.5 -8,8.2 -8,7.2 -6.148,5.348 -6.148,4.25 -6.513,3.885 -7.647,3.885
PULSER_OUT_B on Layer 4 "PULSER_OUT_B_L04_P045" (solid, pour order 45): -11.45,-8.525 -11.625,-8.35 -11.625,-7.855 -11.32,-7.55 -10.955,-7.55 -7.1,-9 -6.825,-9.275 -6.825,-9.7 -7,-9.875 -7.425,-9.875 -10.955,-8.525
GND on Top Layer "GND_L01_P042" (solid, remove dead copper, pour order 42): -47.613,27.488 32.387,27.488 32.387,-25.012 -47.613,-25.012
TX_RX on Top Layer "TX_RX_L01_P041" (solid, pour order 41): -2.7,-2.731 -2.266,-3.15 2.15,-3.15 3.017,-2.283 3.017,2.283 2,3.3 -1.5,3.3 -2.15,2.65 -2.15,2.125 -1.325,1.3 -1.325,-0.875 -2.7,-2.25
VOUT_POS on Top Layer "VOUT_POS_L01_P039" (solid, pour order 39): -16.996,-8.605 -17.002,-8.61 -17.002,-9.711 -14.7,-9.711 -13.8,-9.575 -13.814,-9.561 -13.8,-8.871 -14.804,-8.737 -17,-8.6
PVCC on Top Layer "PVCC_L01_P040" (solid, pour order 40): -18.775,-0.944 -18.766,-0.952 -18.217,-0.944 -17.527,-1.09 -17.439,-2.091 -17.07,-2.091 -16.433,-2.728 -15.543,-2.728 -14.836,-3.077 -13.838,-3.077 -13.838,-1.929 -14.954,-1.389 -14.954,-0.509 -14.963,-0.5 -15.703,-0.5 -15.703,-1.212 -15.943,-1.453 -16.565,-1.453 -16.928,-1.09 -16.928,-0.509 -17.527,-0.509 -17.531,-0.513 -18.18,-0.209 -18.77,-0.209
+HV on Top Layer "+HV_L01_P038" (solid, pour order 38): -9.99,-8.627 -9.974,-8.611 -9.974,-8.627 -9.702,-7.84 -9.712,-7.83 -9.712,-6.652 -10.125,-6.652 -10.15,-6.678 -10.15,-7.84 -10.729,-8.627 -11.079,-8.627 -11.82,-8.716 -12.078,-8.45 -12.078,-7.229 -12.098,-7.209 -13.147,-7.209 -13.172,-8.202 -13.086,-8.867 -13.086,-9.57 -13.096,-9.58 -13.042,-9.633 -9.985,-9.633 -9.985,-8.642 -9.98,-8.637
DVCC1 on Top Layer "DVCC1_L01_P037" (solid, pour order 37): -19.55,9.8 -17.6,9.8 -17.375,9.575 -17.375,9.3 -17.5,9.175 -18.4,9.175 -18.55,9.025 -18.55,8.65 -19.55,8.65
GND on Layer 5 "GND_L05_P081" (solid, pour order 81): -48.4,28.025 8.125,28.025 8.125,-24.475 -48.4,-24.475
GND on Layer 5 "GND_L05_P082" (solid, pour order 82): 7.713,10.5 15.7,10.5 15.305,-9.45 7.713,-9.45
GND on Layer 2 "GND_L02_P043" (solid, pour order 43): -47.5,27.5 14.5,27.5 14.5,-10.5 -47.5,-10.5

## Keep-outs
Keep-Out Layer:
  lines w0.1: 7.924,-6.672 7.923,-6.672 7.851,-6.672 7.71,-6.7 7.578,-6.755 7.459,-6.835 7.358,-6.936 7.278,-7.055 7.223,-7.188 7.195,-7.328 7.195,-7.4 7.195,-10.5 -31.7,-10.5 -31.7,10.5 7.195,10.5 7.195,7.4 7.195,7.304 7.245,7.119 7.341,6.953 7.476,6.818 7.642,6.722 7.827,6.673 8.018,6.673 8.203,6.722 8.369,6.818 8.505,6.953 8.6,7.119 8.65,7.304 8.65,7.4 ; 7.924,-6.672 7.924,-6.672 ; 7.924,-6.672 7.995,-6.672 8.135,-6.7 8.268,-6.755 8.387,-6.835 8.488,-6.936 8.567,-7.055 8.622,-7.188 8.65,-7.328 8.65,-7.4 8.65,-9.45 13.2,-9.45 13.2,9.495 8.65,9.495 8.65,7.4 ; 8.65,7.4 8.65,7.4

## Other copper
Top Layer:
  pour cut-out: 14.82,-10.938 14.8,-10.958 7.832,-10.958 7.832,-9.806 8.106,-9.533 14.82,-9.533
Layer 2:
  pour cut-out: 14.838,-10.88 14.818,-10.9 7.85,-10.9 7.85,-9.749 8.124,-9.475 14.838,-9.475
  pour cut-out: 14.838,-10.88 14.818,-10.9 7.85,-10.9 7.85,-9.749 8.124,-9.475 14.838,-9.475

## Silkscreen, mask and mechanical layers (free items; w line width, h text height)
Top Overlay:
  drawing of 42 lines, arcs and shapes, not listed
  text "GND" at -31.375,8.675 h0.8
  text "CH7" at 7.82,4.92 h0.6
  text "CH6" at 7.82,3.32 h0.6
  text "CH5" at 7.82,1.72 h0.6
  text "CH4" at 7.82,0.12 h0.6
  text "CH3" at 7.82,-1.48 h0.6
  text "CH2" at 7.82,-3.08 h0.6
  text "CH1" at 7.82,-4.68 h0.6
  text "US shield v1.0" at 6.05,-5.15 h0.8 r90
  text "CH0" at 7.82,-6.28 h0.6
Bottom Overlay:
  drawing of 43 lines, arcs and shapes, not listed
  text "CH8" at 9.43,5.689 h0.6
  text "CH9" at 9.43,4.089 h0.6
  text "US shield v1.0" at -22.125,3.6 h0.8 r90
  text "CH10" at 9.43,2.489 h0.6
  text "CH11" at 9.43,0.889 h0.6
  text "+HV" at 5.925,0.425 h0.8 r270
  text "ZURICH" at -20.45,0.175 h0.8 r90
  text "CH12" at 9.43,-0.711 h0.6
  text "CH13" at 9.43,-2.311 h0.6
  text "CH14" at 9.43,-3.911 h0.6
  text "-HV" at 6.05,-4.6 h0.8 r270
  text "CH15" at 9.43,-5.511 h0.6
  text "GND" at 6.1,-9.8 h0.8 r270

## Text inside footprints (layer, text, board x,y; h text height)
D3: Bottom Assembly "BD" at -7.075,-2.573 h0.8; Bottom Overlay "*" at -9.6,-1.075 h0.8 r180; Bottom 3D Body "*" at -8.49,-1.688 h0.8 r180
U11: Top Overlay "*" at 3.25,4.625 h0.8 r270; Top 3D Body "*" at 2.413,3.442 h0.8 r270